# Altium PCB HEART-RATE-SENSOR-PCB.PcbDoc
Units mm, origin at the board's own origin, x right, y up, seen from the top; angles counter-clockwise.
Board outline 10.41 x 9.78 mm, 2 copper layers (Top Layer, Bottom Layer); 14 components, 8 nets, 48 pads, 8 vias.
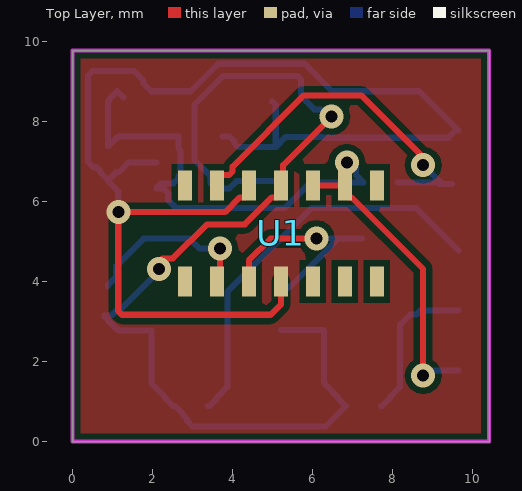
[diagram p0: Top Layer view]
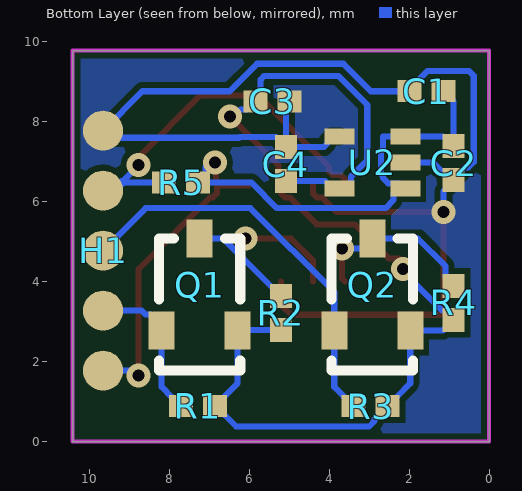
[diagram p1: Bottom Layer view, seen from below]

## Layer stack, top to bottom
Top Solder: solder mask 0.0102, Solder Resist, Dk 3.5
Top Layer: signal copper 0.0356
Dielectric 1: dielectric 0.32, FR-4, Dk 4.8
Bottom Layer: signal copper 0.0356
Bottom Solder: solder mask 0.0102, Solder Resist, Dk 3.5

## Board outline
0,0 10.414,0 10.414,9.779 0,9.779

## Design rules (kind name [scope] priority, off if disabled: settings)
Clearance [All] p1: gap=0.152 ignorepadtopadclearanceinfootprint=FALSE
HoleSize [All] p1: absolutevalues=TRUE maxlimit=10 minlimit=0.3 maxpercent=80.000 minpercent=20.000
MinimumAnnularRing [All] p1: minimumring=0.15
MinimumSolderMaskSliver [All] p1: minsoldermaskwidth=0.001
PolygonConnect [All] p1: connectstyle=Direct reliefconductorwidth=0.254 reliefentries=4 polygonreliefangle="90 Angle" airgapwidth=0.254
RoutingVias [All] p1: holewidth=0.3 width=0.5 viastyle="Through Hole" minholewidth=0.3 minwidth=0.5 maxholewidth=50 maxwidth=1.27
SilkToSolderMaskClearance [IsPad] p1: minsilkscreentomaskgap=0.025 clearancetoexposedcopper=TRUE
SolderMaskExpansion [All] p1: expansion=0.102
Width [All] p1: maxlimit=0.508 minlimit=0.152 preferedwidth=0.152
27 further rules are at their usual default settings.

## Components (designator, comment, footprint, x,y, rotation, side; value= is the part's Value field where it differs from the comment)
C1 "10uF" 0402[IMP] 1.143,8.763 r0 bottom
C2 "0.1uF" 0402[IMP] 0.889,7.391 r270 bottom
C3 "0.1uF" 0402[IMP] 5.842,8.509 r180 bottom
C4 "4.7uF" 0402[IMP] 5.08,6.516 r90 bottom
H1 "Header 5" I2C_Header 9.652,1.778 r90 bottom
Q1 "MOSFET-N" SOT23 7.239,5.08 r180 bottom
Q2 "MOSFET-N" SOT23 2.921,5.08 r180 bottom
R1 "4.7k" 0402[IMP] 7.708,0.889 r180 bottom
R2 "4.7k" 0402[IMP] 5.207,2.794 r90 bottom
R3 "4.7k" 0402[IMP] 3.39,0.889 r180 bottom
R4 "4.7k" 0402[IMP] 0.889,3.048 r90 bottom
R5 "4.7k" 0402[IMP] 8.128,6.477 r180 bottom
U1 "MAX30105" OLGA-14 5.207,5.207 r90 top
U2 "TLV70018" SC70-5pin 2.921,7.112 r0 bottom

## Footprints (in the part's own frame and the unit in brackets; to place one, negate y for a bottom-side part, rotate by r counter-clockwise, add the part's x,y. Pads: shape width x height; smd on the part's side, far side on the other; paste and mask are expansions set on the pad)
0402[IMP] [mm]
  rect 0.6x0.55 smd: 1(0,0) 2(0.85,0)
I2C_Header [mm]
  round 1 smd: 1(0,0) 2(1.5,0) 3(3,0) 4(4.5,0) 5(6,0)
OLGA-14 [mm]
  rect 0.75x0.35 smd paste+0: 1(-1.2,2.4) 2(-1.2,1.6) 3(-1.2,0.8) 4(-1.2,0) 5(-1.2,-0.8) 6(-1.2,-1.6) 7(-1.2,-2.4) 8(1.2,-2.4) 9(1.2,-1.6) 10(1.2,-0.8) 11(1.2,0) 12(1.2,0.8) 13(1.2,1.6) 14(1.2,2.4)
SC70-5pin [mm]
  rect 0.75x0.4 smd paste+0: 1(-0.825,0.777) 2(-0.825,0.127) 3(-0.825,-0.523) 4(0.825,-0.523) 5(0.825,0.777)
SOT23 [mm]
  rect 0.65x0.95 smd: 1(-0.95,-2.3) 2(0.95,-2.3) 3(0,0)
  silkscreen extent -1.02,-3.3 1.02,0

## Part data
C1: library part CAPACITOR, Current=CIMAX, MAX_TEMP=CTMAX, PSpiceTemplate="C^@REFDES %1 %2 ?TOLERANCE|C^@REFDES| @VALUE ?IC/IC=@IC/ TC=@TC1,@TC2 ?TOLERANCE|\n.model C^@REFDES CAP C=1 DEV=@TOLERANCE%|", Supplier Part Number 1=587-3237-1-ND, VOLTAGE=CMAX, CLASS=DISCRETE, DIST=FLAT, KNEE=CBMAX, SLOPE=CSMAX, Supplier 1=Digi-Key, TC1=0, TC2=0
C2 C3: library part CAPACITOR, Current=CIMAX, MAX_TEMP=CTMAX, PSpiceTemplate="C^@REFDES %1 %2 ?TOLERANCE|C^@REFDES| @VALUE ?IC/IC=@IC/ TC=@TC1,@TC2 ?TOLERANCE|\n.model C^@REFDES CAP C=1 DEV=@TOLERANCE%|", Supplier Part Number 1=490-3261-1-ND, VOLTAGE=CMAX, CLASS=DISCRETE, DIST=FLAT, KNEE=CBMAX, SLOPE=CSMAX, Supplier 1=Digi-Key, TC1=0, TC2=0
C4: library part CAPACITOR, Current=CIMAX, MAX_TEMP=CTMAX, PSpiceTemplate="C^@REFDES %1 %2 ?TOLERANCE|C^@REFDES| @VALUE ?IC/IC=@IC/ TC=@TC1,@TC2 ?TOLERANCE|\n.model C^@REFDES CAP C=1 DEV=@TOLERANCE%|", Supplier Part Number 1=445-5947-1-ND, VOLTAGE=CMAX, CLASS=DISCRETE, DIST=FLAT, KNEE=CBMAX, SLOPE=CSMAX, Supplier 1=Digi-Key, TC1=0, TC2=0
Q1 Q2: "N-Channel MOSFET", Supplier Part Number 1=BSS138-FDICT-ND, LatestRevisionDate=17-Jul-2002, LatestRevisionNote="Re-released for DXP Platform.", PackageDescription="TO, Flat Index; 3 In-Line, Axial Leads; Body Dia. 4.6mm; Lead Dia. 0.5 mm (max)", PackageReference=E3, PackageVersion=1995/1996, Published=8-Jun-2000, Publisher="Altium Limited", Supplier 1=Digi-Key
R1 R2 R3 R4 R5: library part RESISTOR, Supplier Part Number 1=P4.7KJCT-ND, Supplier 1=Digi-Key
U1: Supplier Part Number 1=MAX30105EFD+TCT-ND, Supplier 1=Digi-Key
U2: library part SP6214, Supplier Part Number 1=296-32409-1-ND, Supplier 1=Digi-Key

## Via types
v1: diameter 0.6, hole 0.3, Top Layer to Bottom Layer, 8 vias

## Nets (pads, with @x,y where several pads share a name; then routed paths per layer and width w, separated by ;. In a path a pad name is that pad's centre, name@x,y a point inside that pad or via, vN(x,y) a via of type N, cw(c..) or ccw(c..) an arc to the next point about the centre after c; other vN are vias at no path point)
1.8V: C3.1 C4.1 Q1.2 Q2.2 R1.2 R2.1 R3.2 R4.1 U1.11 U2.5 | length 28.1
  Top Layer w0.152: v1(2.159,4.318) 2.159,4.491 2.25,4.582 2.509,4.582 3.362,5.435 4.309,5.435 4.981,6.108 5.108,6.108 5.207,6.207 U1.11 5.266,6.466 5.266,6.917 v1(6.477,8.128)
  Bottom Layer w0.152: v1(2.159,4.318) 2.18,4.318 2.194,4.304 1.169,3.28 1.088,3.28 1.088,3.272 0.97,3.154 0.783,3.154 R4.1 0.889,3.023 1.088,2.824 1.113,2.824 1.157,2.78 Q2.2 1.971,1.458 2.316,1.113 2.316,1.088 2.515,0.889 R3.2 2.565,0.889 2.764,0.69 2.764,0.665 2.861,0.568 2.861,0.519 3,0.381 6.325,0.381 6.833,0.889 6.634,1.088 6.634,1.113 6.289,1.458 Q1.2 6.275,2.794 R2.1 ; C4.1 4.102,6.516 3.921,6.335 U2.5 3.573,6.335 3.449,6.459 3.449,6.632 3.048,7.033 3.048,8.421 3.771,9.144 5.626,9.144 5.715,9.055 5.715,8.636 C3.1 6.041,8.31 6.214,8.31 6.396,8.128 v1(6.477,8.128)
3.3V: C1.1 C2.1 H1.1 R5.2 U1.9 U1.10 U2.1 U2.3 | length 20
  Top Layer w0.152: U1.10 U1.9 ; v1(6.858,6.985) 6.858,7.061 6.832,7.086 6.832,6.432 U1.9 ; v1(8.763,1.651) 8.763,4.318 6.973,6.108 6.906,6.108 6.807,6.207 U1.9
  Bottom Layer w0.152: C2.1@0.889,7.416 C2.1 ; C1.1@1.27,8.611 1.118,8.763 0.919,8.564 0.919,8.539 0.889,8.509 C2.1 ; v1(6.858,6.985) 6.985,6.985 7.089,6.881 7.089,6.666 R5.2 5.939,6.477 5.304,5.842 2.589,5.842 2.393,6.038 2.393,6.211 2.269,6.335 U2.1 2.22,6.459 2.522,6.459 2.652,6.589 2.652,6.643 2.7,6.69 2.7,7.28 2.652,7.327 2.652,7.635 U2.3 1.158,7.635 1.113,7.59 1.088,7.59 C2.1 ; v1(8.763,1.651) 8.796,1.651 8.923,1.778 H1.1
GND: C1.2 C2.2 C3.2 C4.2 H1.5 U1.4 U1.12 U2.2 U2.4 | length 34
  Top Layer w0.152: v1@1.143,5.715 1.143,3.264 1.232,3.175 4.953,3.175 5.207,3.429 U1.4 ; v1(1.143,5.74) 3.813,5.74 4.182,6.108 4.308,6.108 4.407,6.207 U1.12
  Bottom Layer w0.152: v1(1.143,5.74) 1.143,6.262 0.889,6.516 C2.2 ; U2.2 1.406,6.985 1.161,6.74 1.088,6.74 C2.2 ; U2.4 3.921,7.635 4.045,7.511 4.045,7.455 4.134,7.366 C4.2 ; C3.2 5.08,8.421 C4.2 ; C2.2 0.69,6.74 0.69,6.773 0.601,6.862 0.519,6.862 0.385,6.996 0.385,9.148 0.508,9.271 1.533,9.271 1.769,9.035 1.769,8.962 1.968,8.763 C1.2 2.959,8.763 3.645,9.449 5.8,9.449 6.486,8.763 8.667,8.763 H1.5 9.572,7.778 9.393,7.599 6.258,7.599 6.237,7.62 5.334,7.62 C4.2
NetH1_2: H1.2 Q1.1 R1.1 | length 3.9
  Bottom Layer w0.152: R1.1 7.733,0.889 7.932,1.088 7.932,1.113 8.189,1.37 Q1.1 8.189,2.93 8.438,3.179 8.588,3.179 8.687,3.278 H1.2
NetH1_3: H1.3 Q2.1 R3.1 | length 10.2
  Bottom Layer w0.152: R3.1 3.415,0.889 3.614,1.088 3.614,1.113 3.871,1.37 Q2.1 3.871,3.744 5.969,5.842 8.588,5.842 H1.3
NetH1_4: H1.4 R5.1 U1.13 | length 9.2
  Top Layer w0.152: U1.13 3.607,6.57 3.706,6.668 3.914,6.668 4.003,6.758 4.003,6.877 5.783,8.657 7.218,8.657 8.763,7.112 v1(8.763,6.917)
  Bottom Layer w0.152: R5.1 9.139,6.477 9.176,6.44 H1.4@9.26,6.44 ; v1(8.763,6.917) 9.164,6.516 9.185,6.516 H1.4@9.26,6.44 ; H1.4@9.49,6.44 H1.4@9.26,6.44
SCL_LV: Q2.3 R4.2 U1.2 | length 4.4
  Top Layer w0.152: U1.2 3.683,4.083 v1(3.683,4.826)
  Bottom Layer w0.152: R4.2 0.889,3.923 1.088,4.122 1.088,4.39 1.778,5.08 Q2.3 3.175,4.826 v1(3.683,4.826)
SDA_LV: Q1.3 R2.2 U1.3 | length 5.6
  Top Layer w0.152: U1.3 4.407,4.534 4.953,5.08 v1(6.096,5.08)
  Bottom Layer w0.152: R2.2 5.207,3.669 5.406,3.868 5.431,3.868 6.643,5.08 ; v1(6.096,5.08) 6.643,5.08 ; Q1.3 6.643,5.08
pads on no net: U1.1 U1.5 U1.6 U1.7 U1.8 U1.14

## Polygon pours and split planes (outlines as drawn)
GND on Top Layer "GND_L01_P000" (solid, remove dead copper, pour order 0): 0,0 0,9.779 10.414,9.779 10.414,0
GND on Bottom Layer "GND_L02_P002" (solid, remove dead copper, pour order 2): 0,0 0,9.779 10.414,9.779 10.414,0

## Keep-outs
Keep-Out Layer:
  the board outline again, w0.1